# Altium PCB PCB1.PcbDoc
Units mm, origin at the board's own origin, x right, y up, seen from the top; angles counter-clockwise.
Board outline 152.4 x 101.6 mm, 2 copper layers (Top Layer, Bottom Layer); 14 components, 10 nets, 35 pads, 6 vias.
Unrouted connection lines stored in the file: 5.
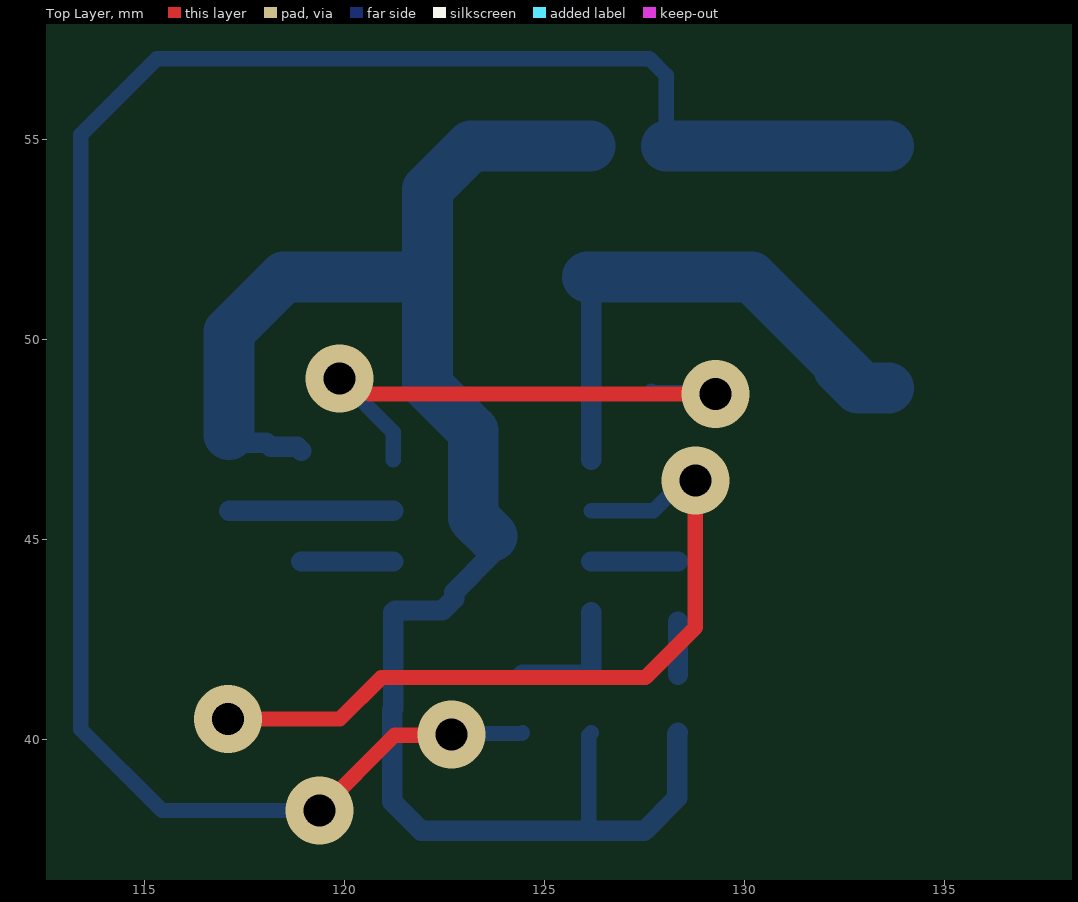
[diagram p0: Top Layer view]
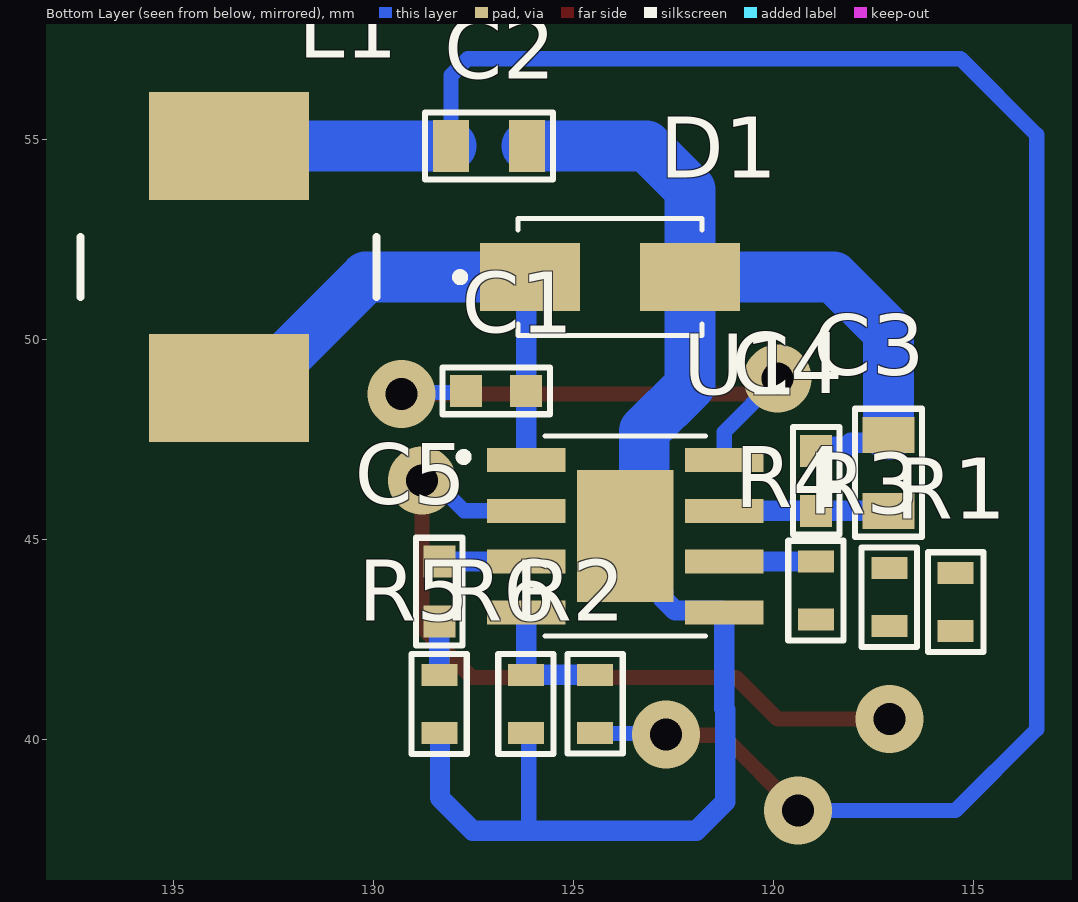
[diagram p1: Bottom Layer view, seen from below]
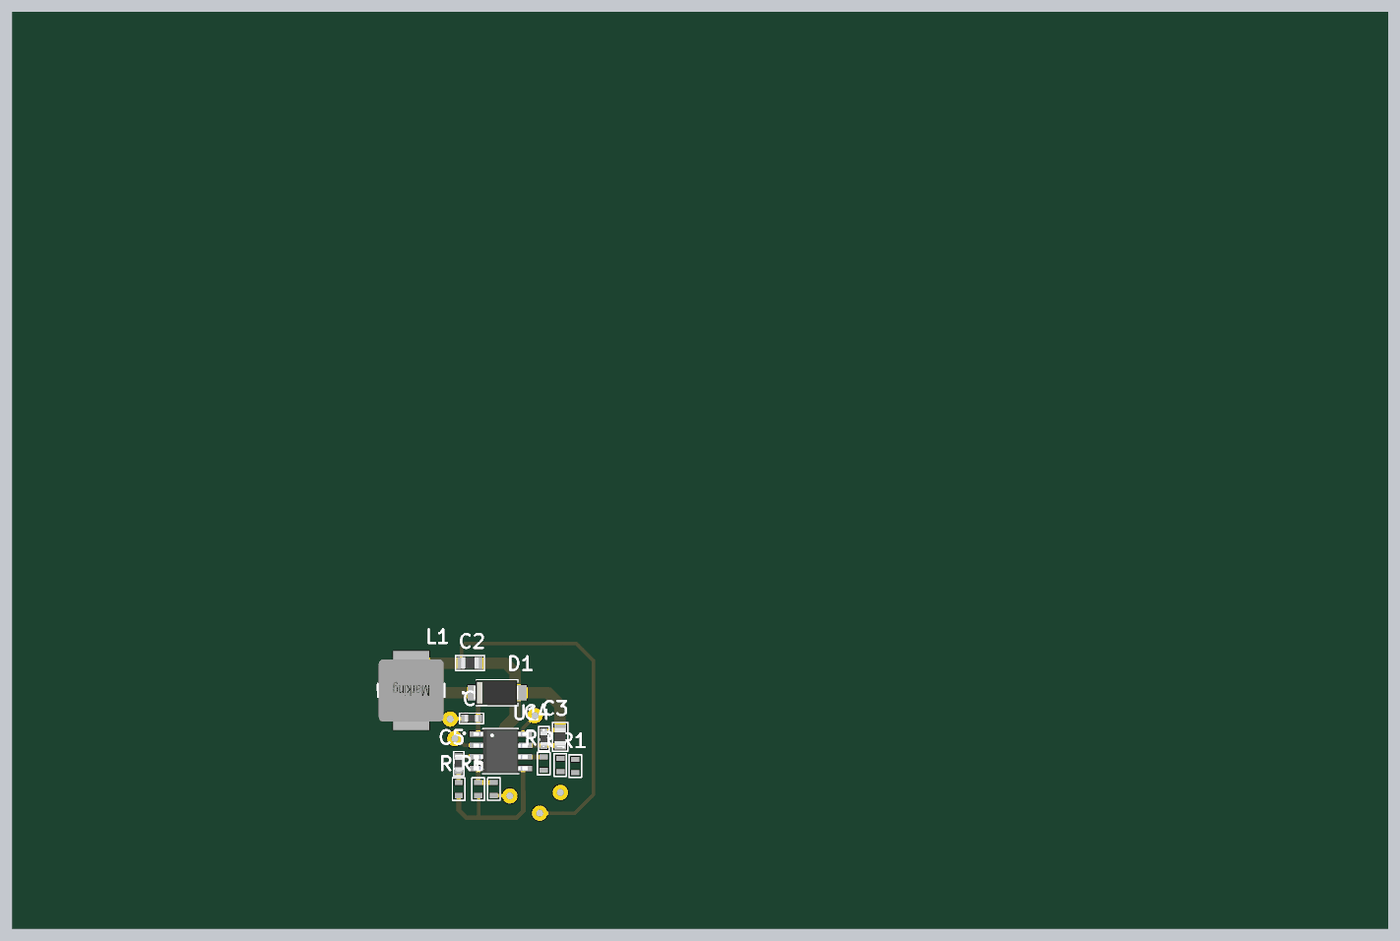
[diagram p2: 3D render of the assembled board from below, using the file's embedded part models]

## Layer stack, top to bottom
Top Solder: solder mask 0.0102, Solder Resist, Dk 3.5
Top Layer: signal copper 0.0356
Dielectric 1: dielectric 0.32, FR-4, Dk 4.8
Bottom Layer: signal copper 0.0356
Bottom Solder: solder mask 0.0102, Solder Resist, Dk 3.5

## Board outline
25.4,25.4 177.8,25.4 177.8,127 25.4,127

## Design rules (kind name [scope] priority, off if disabled: settings)
Clearance [All] p1: gap=0.381 ignorepadtopadclearanceinfootprint=FALSE
PolygonConnect [All] p1: connectstyle=Relief reliefconductorwidth=0.254 reliefentries=4 polygonreliefangle="90 Angle" airgapwidth=0.254
RoutingVias [All] p1: holewidth=0.8 width=1.7 viastyle="Through Hole" minholewidth=0.8 minwidth=1.7 maxholewidth=0.8 maxwidth=1.7
SolderMaskExpansion [All] p1: expansion=0.102 istentingtop=FALSE
SupplyNets "Schematic Supply Nets_2" [InNet('5V')] p1: voltage=0.000
SupplyNets "Schematic Supply Nets_1" [InNet('VCC')] p2: voltage=0.000
SupplyNets "Schematic Supply Nets" [InNet('GND')] p3: voltage=0.000
Width [All] p1: maxlimit=1.27 minlimit=0.381 preferedwidth=0.508
30 further rules are at their usual default settings.

## Classes and differential pairs
component class Sheet1: C2 C3 D1 L1 R1 R2 R3 R4 R5 R6 U1

## Components (designator, comment, footprint, x,y, rotation, side; value= is the part's Value field where it differs from the comment)
C1 "100nF" CAP_0603 126.873,48.641 r180 bottom
C2 "22uF" CAP_0805 127.127,54.816 r0 bottom
C3 "10uF" CAP_0805 117.094,46.645 r270 bottom
C4 "100nF" CAP_0603 118.999,46.419 r270 bottom
C5 "150pF" CAP_0603 128.27,43.751 r90 bottom
D1 "Diode_SS54" D_SMA 124.079,51.562 r180 bottom
L1 "10uH, 4A" Inductor_0630 133.604,51.816 r90 bottom
R1 "Res_100K_0603_1%" Resistor_0603 115.443,43.434 r270 bottom
R2 "Res_53.6K_0603_1%" Resistor_0603 124.46,40.894 r270 bottom
R3 "Res_24K_0603_5%" Resistor_0603 117.094,43.561 r90 bottom
R4 "Res_100K_0603_1%" Resistor_0603 118.923,43.725 r90 bottom
R5 "Res_100K_0603_1%" Resistor_0603 128.346,40.894 r90 bottom
R6 "Res_10.2K_0603_1%" Resistor_0603 126.173,40.894 r90 bottom
U1 "MP1584EN-LF-Z" SOIC-8 123.698,45.085 r180 bottom

## Footprints (in the part's own frame and the unit in brackets; to place one, negate y for a bottom-side part, rotate by r counter-clockwise, add the part's x,y. Pads: shape width x height; smd on the part's side, far side on the other; paste and mask are expansions set on the pad)
CAP_0603 [mm]
  rect 0.8x0.8 smd: 1(-0.801,0.076) 2(0.699,0.076)
  silkscreen extent -1.4,-0.51 1.3,0.66, body extent -0.85,-0.32 0.75,0.48, height 0.8
CAP_0805 [mm]
  rect 0.9x1.3 smd: 1(-0.975,-0.025) 2(0.925,-0.025)
  silkscreen extent -1.63,-0.86 1.57,0.81, body extent -1.03,-0.65 0.97,0.6, height 0.6
D_SMA [mm]
  rect 2.5x1.7 smd: 1(-2,0) 2(2,0)
  silkscreen extent -3.85,-1.46 2.3,1.46, body extent -2.63,-1.35 2.37,1.35, height 2.22
Inductor_0630 [mm] "SMD Power Inductor, body 7x7x3mm"
  rect 2.7x4 smd: 1(-3.025,0) 2(3.025,0)
  silkscreen extent -0.75,-3.68 0.75,3.71, body extent -3.45,-3.6 3.45,3.6, height 3.01
Resistor_0603 [mm]
  rect 0.55x0.9 smd: 1(-0.725,0) 2(0.725,0)
  silkscreen extent -1.25,-0.69 1.24,0.7, body extent -0.8,-0.45 0.8,0.45, height 0.5
SOIC-8 [mm]
  rect 1.97x0.6 smd: 1(-2.475,1.905) 2(-2.475,0.635) 3(-2.475,-0.635) 4(-2.475,-1.905) 5(2.475,-1.905) 6(2.475,-0.635) 7(2.475,0.635) 8(2.475,1.905)
  rect 2.41x3.3 smd paste-3: 9(0,0)
  silkscreen extent -4.14,-2.5 2,2.5, body extent -3,-2.45 3,2.45, height 1.7

## Part data
C1 C4: library part Ceramic_Cap_100nF_0603, "CAP, size 0603, 100nF, 50V", Supply Part Number="Tụ Gốm 0603 100nF (0.1uF) 25V", Supply Name=Thegioiic, Supply URL=https://www.thegioiic.com/tu-gom-0603-100nf-0-1uf-25v
C2: library part Ceramic_Cap_22uF_0805, "CAP, size 0805, 22uF, 6.3V", Supply Part Number="Tụ Gốm 0805 22uF 6.3V", Supply Name=Thegioiic, Supply URL=https://www.thegioiic.com/tu-gom-0805-22uf-6-3v
C3: library part Ceramic_Cap_10uF_0805, "CAP, size 0805, 10uF, 50V", Supply Part Number="Tụ Gốm 0805 10uF 50V", Supply Name=Thegioiic, Supply URL=https://www.thegioiic.com/tu-gom-0805-10uf-50v
C5: library part Ceramic_Cap_150pF_0603, "CAP, size 0603, 150pF, 50V", Supply Part Number="Tụ Gốm 0603 150pF 50V", Supply Name=Thegioiic, Supply URL=https://www.thegioiic.com/tu-gom-0603-150pf-50v
D1: "Diode Schottky 40V 5A Surface Mount SMA", Supply Part Number="SS54 SMA Diode Shotky 5A 40V", Datasheet=https://www.thegioiic.com/upload/documents/dc8a63b3eda4738bc390d9dc570a4e18.pdf, Supply Name=Thegioiic, Supply URL=https://www.thegioiic.com/ss54-sma-diode-shotky-5a-40v
L1: library part IND_10uH_0630, "10uH, 4A, Size 0630", Supply Part Number="Cuộn cảm 10UH 0630", Supply Name=icdayroi, Supply URL=https://icdayroi.com/cuon-cam-10uh-0630
R1 R4 R5: "Resistor 0603 100KOhm 1% 1_10W", Supply Part Number="Điện Trở 100 KOhm 0603 1%", Supply Name=Thegioiic, Supply URL=https://www.thegioiic.com/dien-tro-100-kohm-0603-1-
R2: "Resistor 0603 53.6KOhm 1% 1_10W", Supply Part Number="Điện Trở 53.6 KOhm 0603 1%", Supply Name=Thegioiic, Supply URL=https://www.thegioiic.com/dien-tro-53-6-kohm-0603-1-
R3: "Resistor 0603 24KOhm 5% 1_10W", Supply Part Number="Điện Trở 24 KOhm 0603 5%", Supply Name=Thegioiic, Supply URL=https://www.thegioiic.com/dien-tro-24-kohm-0603-5-
R6: "Resistor 0603 10.2KOhm 1% 1_10W", Supply Part Number="Điện Trở 10.2 KOhm 0603 1%", Supply Name=Thegioiic, Supply URL=https://www.thegioiic.com/dien-tro-10-2-kohm-0603-1-
U1: "Buck Switching Regulator IC Positive Adjustable 0.8V 1 Output 3A 8-SOIC _0.154, 3.90mm Width_ Exposed Pad", Datasheet=https://www.monolithicpower.com/en/documentview/productdocument/index/version/2/document_type/Datasheet/lang/en/sku/MP1584EN-LF-Z/document_id/204/?srsltid=AfmBOopCyUDyOs-uLll4YtNPir4o4STehG4B04EkgGGTflYW96m-OPS4, Supply Name=tme, Supply Part Number=MP1584EN-LF-Z, Supply URL=http://www.tme.vn/Product.aspx?id=2070#page=pro_info

## Via types
v1: diameter 1.7, hole 0.8, Top Layer to Bottom Layer, 6 vias

## Nets (pads, with @x,y where several pads share a name; then routed paths per layer and width w, separated by ;. In a path a pad name is that pad's centre, name@x,y a point inside that pad or via, vN(x,y) a via of type N, cw(c..) or ccw(c..) an arc to the next point about the centre after c; other vN are vias at no path point)
5V: C2.2 L1.2 R2.2 | length 50.5
  Top Layer w0.381: v1(119.38,38.227) 121.26,40.107 122.657,40.107 v1(122.682,40.132)
  Bottom Layer w0.381: v1(119.38,38.227) 115.443,38.227 113.411,40.259 113.411,55.118 115.316,57.023 127.635,57.023 128.052,56.606 C2.2 ; v1(122.682,40.132) 122.701,40.151 124.442,40.151 R2.2
  Bottom Layer w1.27: C2.2 L1.2
GND: C2.1 C3.1 C4.1 D1.2 R3.1 R4.1 R5.1 R6.1 U1.5 U1.9 | length 44.2
  Bottom Layer w0.381: 126.111,37.719 126.111,40.107 R6.1
  Bottom Layer w0.508: C3.1 117.315,47.424 118.057,47.424 118.161,47.32 118.823,47.32 C4.1 ; U1.9 123.698,44.64 122.747,43.689 122.747,43.524 122.449,43.226 121.269,43.226 U1.5 121.223,40.773 121.197,40.747 121.197,38.442 121.92,37.719 126.111,37.719 127.508,37.719 128.33,38.541 128.33,40.152 R5.1
  Bottom Layer w1.27: C3.1 117.119,50.19 118.491,51.562 D1.2 ; U1.9 123.224,45.559 123.224,47.711 122.079,48.856 D1.2 ; C2.1 123.167,54.841 122.079,53.753 D1.2
NetC1_1: C1.1 U1.8 | length 13.8
  Top Layer w0.381: v1(119.888,49.022) 120.245,49.022 120.626,48.641 v1(129.286,48.641)
  Bottom Layer w0.381: v1(119.888,49.022) 121.223,47.687 U1.8 ; C1.1 127.712,48.679 129.248,48.679 v1(129.286,48.641)
NetC1_2: C1.2 D1.1 L1.1 U1.1 | length 14
  Bottom Layer w0.508: D1.1 126.174,51.467 C1.2 U1.1@126.174,46.991 ; U1.1 U1.1@126.175,46.992
  Bottom Layer w1.27: D1.1 130.183,51.562 132.954,48.791 L1.1 ; L1.1@132.371,49.262 L1.1@132.842,48.791
NetC5_1: C5.1 R5.2 | length 1.3
  Bottom Layer w0.508: R5.2 C5.1
NetC5_2: C5.2 U1.3 | length 2.2
  Bottom Layer w0.508: U1.3 C5.2
NetR1_1: R1.1 R3.2 U1.2 | length 19.3
  Top Layer w0.381: v1(117.094,40.513) 119.888,40.513 120.929,41.554 127.533,41.554 128.778,42.799 v1@128.778,46.503
  Bottom Layer w0.381: U1.2 127.73,45.72 128.492,46.482 v1(128.778,46.482)
NetR2_1: R2.1 R6.2 U1.4 | length 3.3
  Bottom Layer w0.508: R2.1 R6.2 U1.4
NetR4_2: R4.2 U1.6 | length 2.3
  Bottom Layer w0.508: R4.2 U1.6
VCC: C3.2 C4.2 R1.2 U1.7 | length 4.1
  Bottom Layer w0.508: C3.2 C4.2 U1.7